# Altium PCB Soldeer.PcbDoc
Units mm, origin at the board's own origin, x right, y up, seen from the top; angles counter-clockwise.
Board outline 137.34 x 84.51 mm, 2 copper layers (Top Layer, Bottom Layer); 63 components, 73 nets, 216 pads, 72 vias.
Unrouted connection lines stored in the file: 42.
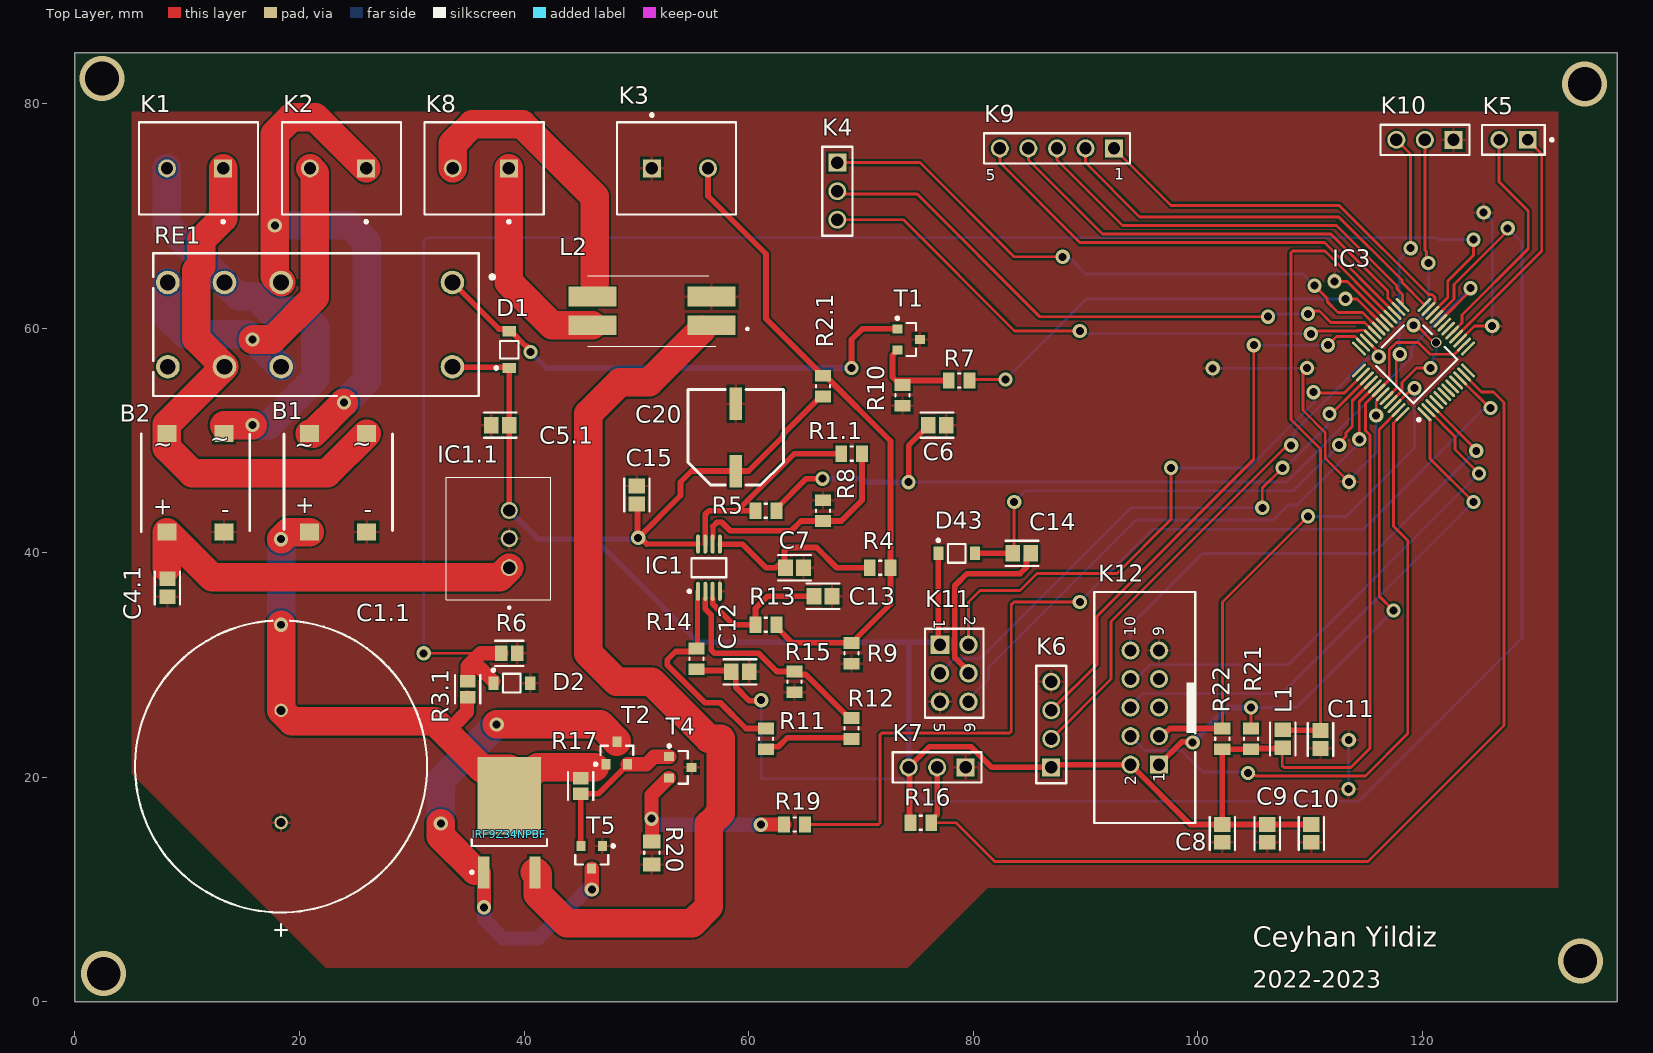
[diagram p0: Top Layer view]
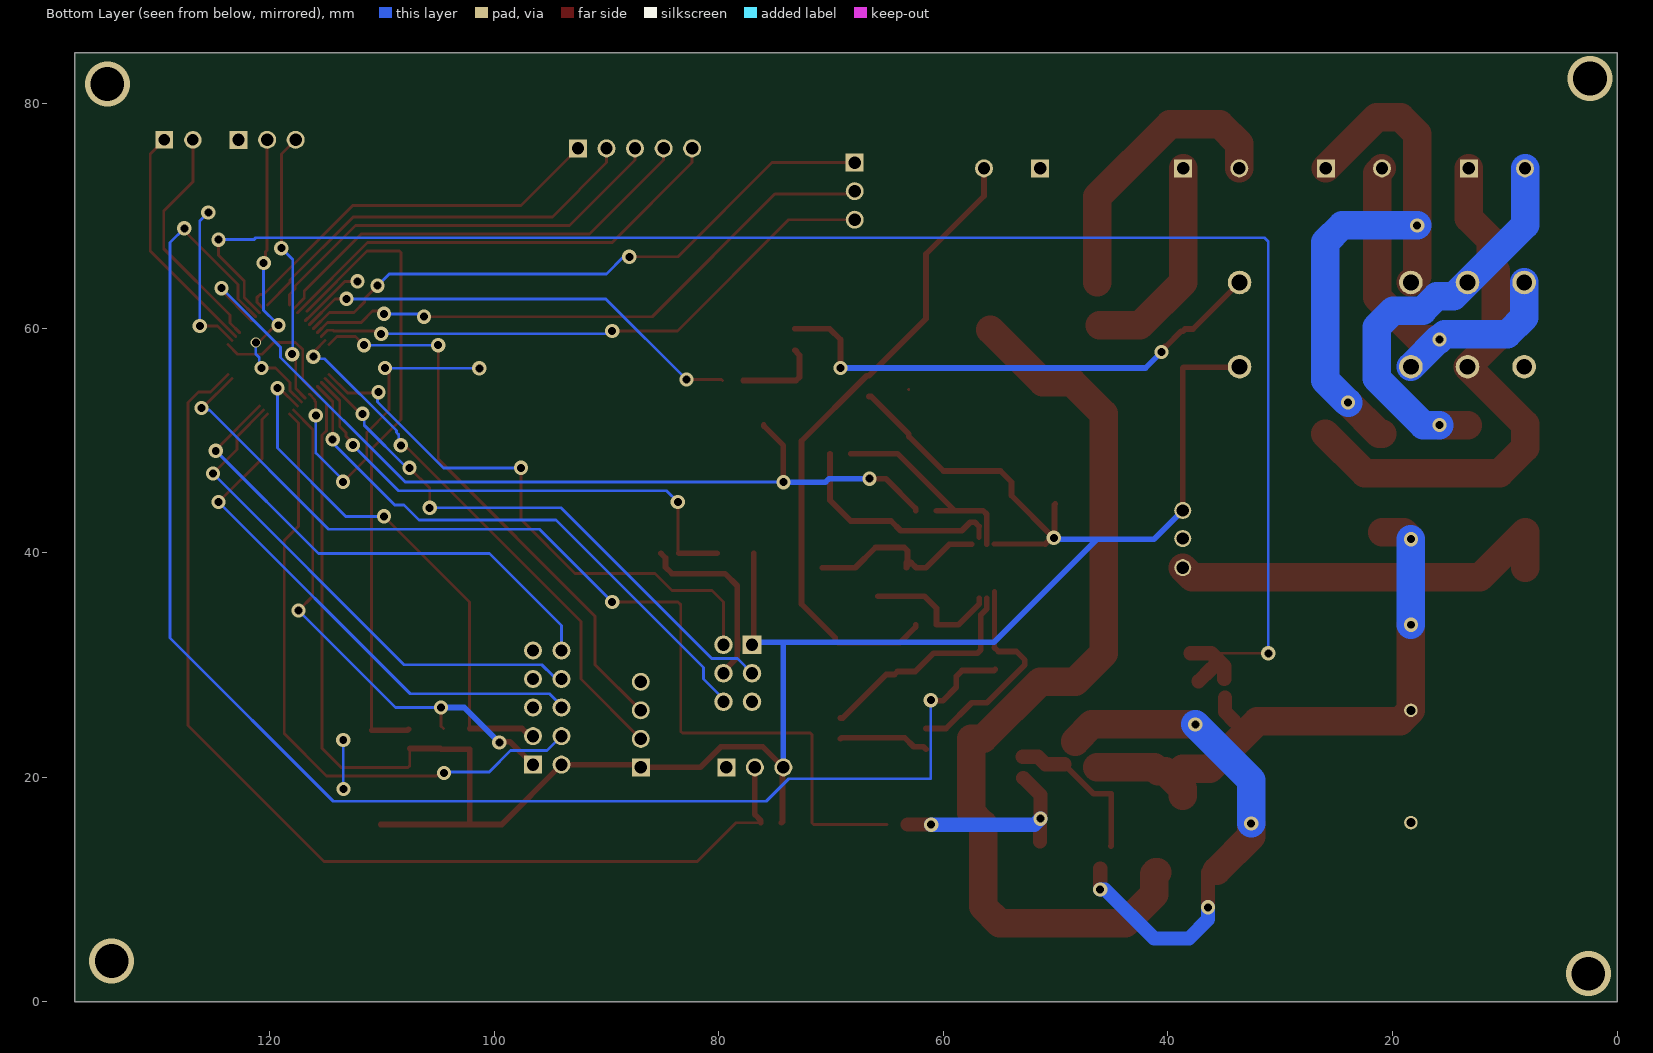
[diagram p1: Bottom Layer view, seen from below]
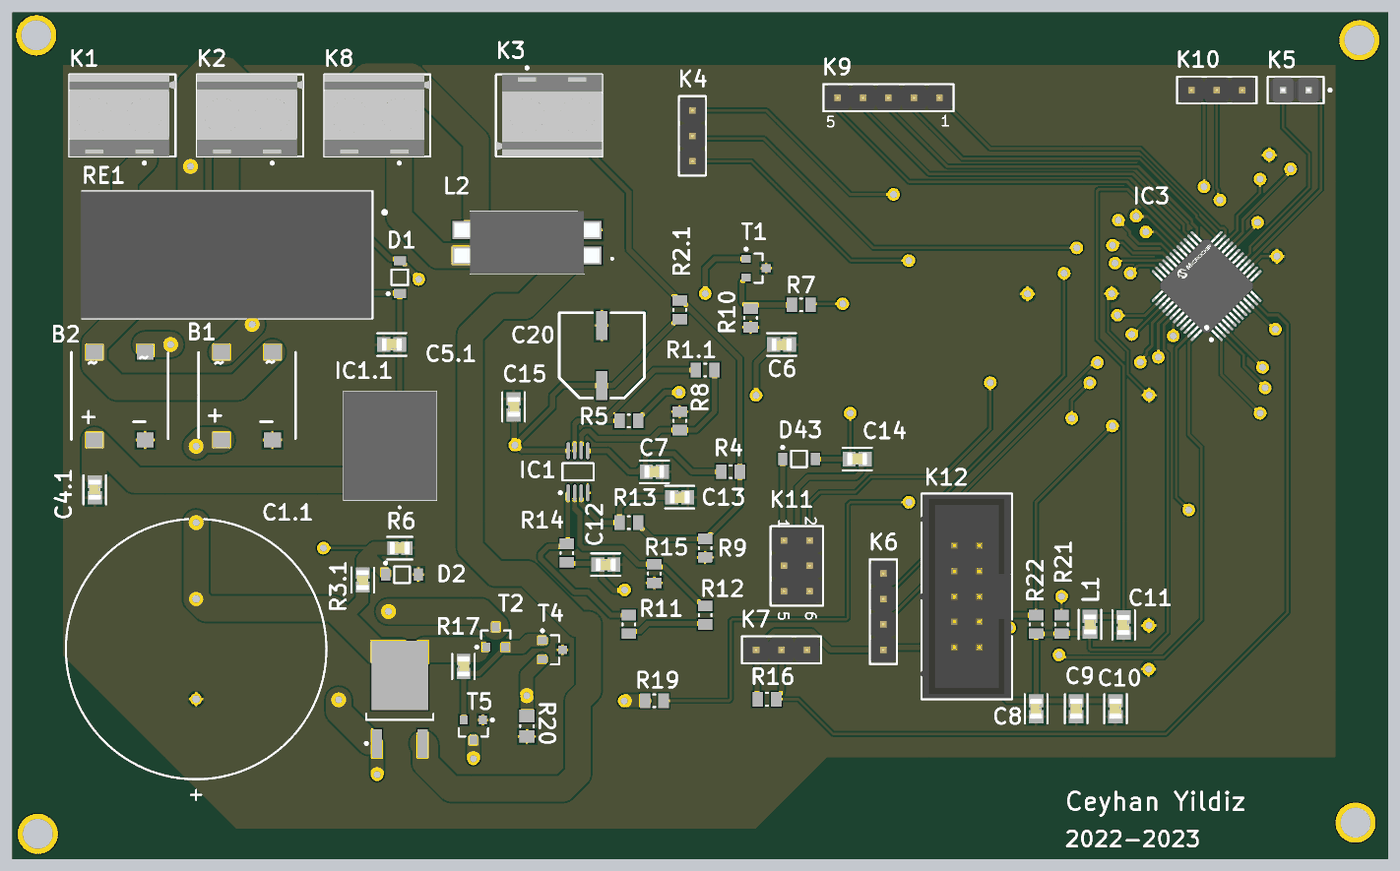
[diagram p2: 3D render of the assembled board from above, using the file's embedded part models]

## Layer stack, top to bottom
Top Solder: solder mask 0.0102, Solder Resist, Dk 3.5
Top Layer: signal copper 0.0356
Dielectric 1: dielectric 0.32, FR-4, Dk 4.8
Bottom Layer: signal copper 0.0356
Bottom Solder: solder mask 0.0102, Solder Resist, Dk 3.5

## Board outline
0,-0.001 137.337,-0.001 137.337,84.505 0,84.505

## Design rules (kind name [scope] priority, off if disabled: settings)
Clearance [All] p1: gap=0.118 ignorepadtopadclearanceinfootprint=FALSE
MinimumSolderMaskSliver [All] p1: minsoldermaskwidth=0.011
PolygonConnect [All] p1: connectstyle=Relief reliefconductorwidth=0.254 reliefentries=4 polygonreliefangle="90 Angle" airgapwidth=0.254
RoutingVias [All] p1: holewidth=0.711 width=1.27 viastyle="Through Hole" minholewidth=0.711 minwidth=1.27 maxholewidth=0.711 maxwidth=1.27
SilkToSolderMaskClearance [IsText] p1: minsilkscreentomaskgap=0.111 clearancetoexposedcopper=TRUE
SolderMaskExpansion [All] p1: expansion=0.102 istentingtop=FALSE
Width [All] p1: maxlimit=2.54 minlimit=0.229 preferedwidth=0.508
28 further rules are at their usual default settings.

## Classes and differential pairs
component class Voeding: B1 B2 C1.1 C4.1 C5.1 D1 D2 IC1.1 K1 K2 R3.1 R6 RE1
component class Thermokoppel: C6 C7 C12 C13 C15 C20 IC1 K3 R1.1 R2.1 R4 R5 R8 R9 R11 R12 R13 R14 R15
component class PBM_soldeerbout: IRF9Z34NPBF K8 L2 R17 R20 T2 T4 T5
component class CPU: C8 C9 C10 C11 C14 D43 IC3 K4 K5 K6 K7 K9 K10 K11 K12 L1 R7 R10 R16 R19 R21 R22 T1

## Components (designator, comment, footprint, x,y, rotation, side; value= is the part's Value field where it differs from the comment)
B1 "Bridge_Rectifier" ttf 23.444,46.278 r180 top
B2 "Bridge_Rectifier" ttf 10.744,46.278 r180 top
C1.1 "4700uf" CE_D25_L25_plugin 18.364,25.958 r270 top value="0.22 μF"
C4.1 "100uf" CC_0805_L 8.246,36.862 r270 top value="0.22 μF"
C5.1 "50uf" CC_0805_L 37.883,51.358 r180 top value="0.22 μF"
C6 "10nf" CC_0805_L 76.784,51.358 r0 top value="0.22 μF"
C7 "10nf" CC_0805_L 64.084,38.658 r0 top value="0.22 μF"
C8 "100n" CC_0805_L 102.184,14.997 r270 top value="0.22 μF"
C9 "10µ, 50V" CC_0805_L 106.181,14.997 r270 top value="0.22 μF"
C10 "100n" CC_0805_L 110.108,14.997 r270 top value="0.22 μF"
C11 "100n" CC_0805_L 110.919,23.361 r270 top value="0.22 μF"
C12 "10nf" CC_0805_L 59.247,29.382 r0 top value="0.22 μF"
C13 "10nf" CC_0805_L 66.624,36.118 r0 top value="0.22 μF"
C14 "100n" CC_0805_L 84.333,39.933 r0 top value="0.22 μF"
C15 "100n" CC_0805_L 50.046,45.13 r90 top value="0.22 μF"
C20 "10µ , 50V" CE_D8_L10 58.841,50.265 r270 top
D1 "Diode" SOD-123FL 38.684,58.073 r90 top value=15pF
D2 "Zener_Diode" SOD-123FL 38.908,28.38 r0 top
D43 "1n4148" SOD-123FL 78.529,39.933 r0 top value=15pF
IC1 "Dual_Opamp" MSOP_8_M 56.464,38.658 r90 top
IC1.1 "OKI-78SR-5/1.5-W36-C" OKI78SR515W36C 38.684,38.658 r90 top
IC3 "ATMEGA4809" TQFP_48_M 119.202,57.2 r135 top
IRF9Z34NPBF "MOSFET_P" TO_252 38.684,15.938 r90 top
K1 "282836-2" terminal_block 10.704,74.218 r180 top
K2 "282836-2" terminal_block 23.444,74.218 r180 top
K3 "282836-2" terminal_block 53.884,74.218 r0 top
K4 "61300311121" "pin header 1x3 - duplicate" 67.894,72.186 r270 top
K5 "M20-9990246" "pin header 1x2 - duplicate" 128.092,76.758 r180 top
K6 "61300411121" "pin header 1x4 - duplicate" 86.944,24.688 r90 top
K7 "61300311121" "pin header 1x3 - duplicate" 76.784,20.878 r180 top
K8 "282836-2" terminal_block 36.144,74.218 r180 top
K9 "61300511121" "pin header 1x5" 87.452,75.996 r180 top
K10 "UART0" "pin header 1x3 - duplicate" 120.218,76.758 r180 top
K11 "61300621121" "pin header 2x6" 78.308,29.26 r270 top
K12 "61201021621" "box header 10-pin" 95.272,26.204 r90 top
L1 "10µA" CC_0805_L 107.561,23.418 r270 top
L2 "Common_Mode_Choke" 2545 51.384,61.518 r90 top
R1.1 "18K" R_0805_M 69.164,48.818 r0 top
R2.1 "1M" R_0805_M 66.624,54.823 r270 top
R3.1 "66Kohm" CC_0805_m 34.984,27.838 r90 top
R4 "5K6" R_0805_M 71.704,38.658 r0 top
R5 "5K6" R_0805_M 61.544,43.738 r180 top
R6 "10Kohm" CC_0805_m 38.684,31.038 r0 top
R7 "10k" R_0805_M 78.739,55.325 r180 top
R8 "100E" R_0805_M 66.624,43.738 r270 top
R9 "10M" R_0805_M 69.164,31.038 r90 top
R10 "4,7k" R_0805_M 73.694,54.009 r90 top
R11 "18K" R_0805_M 61.544,23.418 r270 top
R12 "18K" R_0805_M 69.164,24.343 r90 top
R13 "5K6" R_0805_M 61.544,33.578 r0 top
R14 "5K6" R_0805_M 55.366,30.538 r90 top
R15 "100E" R_0805_M 64.084,28.498 r90 top
R16 "4,7k" R_0805_M 75.335,15.949 r180 top
R17 "4k7" CC_0805_m 45.039,19.223 r90 top
R19 "10K" R_0805_M 64.084,15.798 r0 top
R20 "4k7" R_0805_L 51.384,13.258 r90 top
R21 "4,7k" R_0805_M 104.724,23.418 r270 top
R22 "4,7k" R_0805_M 102.184,23.418 r270 top
RE1 "RELAY_GENERAL_PURPOSE" RT42 33.624,60.308 r180 top
T1 "Transistor_NPN" SOT_23 74.244,58.978 r0 top
T2 "BC547" SOT_23 48.268,22.158 r90 top
T4 "BC547" SOT_23 53.924,20.878 r0 top
T5 "BC557" SOT_23 46.027,12.879 r270 top

## Footprints (in the part's own frame and the unit in brackets; to place one, negate y for a bottom-side part, rotate by r counter-clockwise, add the part's x,y. Pads: shape width x height; smd on the part's side, far side on the other; paste and mask are expansions set on the pad)
2545 [mm]
  rect 1.78x4.27 smd: 1(-1.27,-5.305) 2(1.27,-5.305) 3(1.27,5.305) 4(-1.27,5.305)
  silkscreen extent -3.15,-8.6 3.15,5.69, body extent -3.15,-7.26 3.15,7.26, height 9.6
"box header 10-pin" [mm] "10 pins, straight, gold plating"
  rect 1.6x1.6 hole 1.1: 1(-5.08,-1.27)
  round 1.6 hole 1.1: 2(-5.08,1.27) 3(-2.54,-1.27) 4(-2.54,1.27) 5(0,-1.27) 6(0,1.27) 7(2.54,-1.27) 8(2.54,1.27) 9(5.08,-1.27) 10(5.08,1.27)
  silkscreen extent -10.28,-4.5 10.28,4.5, body extent -10.18,-4.42 10.18,4.75, height 9.13
CC_0805_L [mm]
  rect 1.305x1.456 smd paste+0 mask+0: 1(-0.801,0) 2(0.801,0)
  silkscreen extent -1.45,-1.13 1.45,1.13, body extent -1.7,-0.98 1.7,0.98, height 0.25
CC_0805_m [mm]
  rect 1.105x1.356 smd paste+0 mask+0: 1(-0.701,0) 2(0.701,0)
  silkscreen extent -1.25,-1.12 1.25,1.12, body extent -1.35,-0.82 1.35,0.82, height 0.25
CE_D8_L10 [mm]
  rect 2.9x1.1 smd: 1(-3,0) 2(3,0)
  Top Layer lines w0.254: -4.25,4.241 -4.259,4.25
  silkscreen extent -4.26,-4.25 4.25,4.25
CE_D25_L25_plugin [mm]
  round 1.2 hole 0.8: 1(0,0) 2(10,0)
  silkscreen extent -7.98,-13 20.07,13
MSOP_8_M [mm] "TSOP, 8-Leads, Body 3x3mm, Pitch 0.65mm, IPC Medium Density"
  oval 1.7x0.35 smd: 1(-2.1,0.975) 2(-2.1,0.325) 3(-2.1,-0.325) 4(-2.1,-0.975) 5(2.1,-0.975) 6(2.1,-0.325) 7(2.1,0.325) 8(2.1,0.975)
  silkscreen extent -2.22,-1.55 0.85,1.87, body extent -1.55,-1.55 1.55,1.55, height 1.1
OKI78SR515W36C [mm]
  round 1.519 hole 1.08: 1(0,0) 2(2.6,0) 3(5.1,0)
  silkscreen extent -3.6,-3.7 8.05,5.6, body extent -2.85,-3.7 8.05,5.6, height 16.6
"pin header 1x2 - duplicate" [mm]
  rect 1.57x1.57 hole 1.02 paste-1000 mask+0: 1(-1.27,0)
  round 1.57 hole 1.02 paste-1000 mask+0: 2(1.27,0)
  silkscreen extent -3.55,-1.32 2.79,1.32, body extent -2.89,-1.42 2.89,1.42, height 0.25
"pin header 1x3 - duplicate" [mm] "Pin Header, pitch 2.54 mm, THT, Vertical, single row, 3p"
  rect 1.6x1.6 hole 1.1: 1(-2.54,0)
  round 1.6 hole 1.1: 2(0,0) 3(2.54,0)
  silkscreen extent -3.96,-1.35 3.96,1.35, body extent -3.81,-1.27 3.81,1.27, height 8.57
"pin header 1x4 - duplicate" [mm] "Pin Header, pitch 2.54 mm, THT, Vertical, single row, 4p"
  rect 1.6x1.6 hole 1.1: 1(-3.81,0)
  round 1.6 hole 1.1: 2(-1.27,0) 3(1.27,0) 4(3.81,0)
  silkscreen extent -5.23,-1.35 5.23,1.35, body extent -5.08,-1.27 5.08,1.27, height 8.57
"pin header 1x5" [mm] "Pin Header, pitch 2.54 mm, THT, Vertical, single row, 5p"
  rect 1.6x1.6 hole 1.1: 1(-5.08,0)
  round 1.6 hole 1.1: 2(-2.54,0) 3(0,0) 4(2.54,0) 5(5.08,0)
  silkscreen extent -6.5,-1.35 6.5,1.35, body extent -6.35,-1.27 6.35,1.27, height 8.57
"pin header 2x6" [mm] "Pin Header, pitch 2.54 mm, THT, Vertical, dual row, 6p"
  rect 1.65x1.65 hole 1.1: 1(-2.54,-1.27)
  round 1.65 hole 1.1: 2(-2.54,1.27) 3(0,-1.27) 4(0,1.27) 5(2.54,-1.27) 6(2.54,1.27)
  silkscreen extent -3.96,-2.62 3.96,2.62, body extent -3.81,-2.54 3.81,2.54, height 8.59
R_0805_L [mm] "Chip Resistor, 2-Leads, Body 2.00x1.25mm, IPC Low Density"
  rect 1.25x1.55 smd: 1(-1.025,0) 2(1.025,0)
  silkscreen extent -0.1,-0.67 0.1,0.67, body extent -1.1,-0.72 1.1,0.72, height 0.5
R_0805_M [mm] "Chip Resistor, 2-Leads, Body 2.00x1.25mm, IPC Medium Density"
  rect 1.05x1.45 smd: 1(-0.925,0) 2(0.925,0)
  silkscreen extent -0.1,-0.63 0.1,0.63, body extent -1.1,-0.72 1.1,0.72, height 0.5
RT42 [mm]
  round 2.1 hole 1.4: 11(20.3,3.75) 12(15.26,3.75) 14(25.34,3.75) 21(20.3,-3.75) 22(15.26,-3.75) 24(25.34,-3.75) A1(0,3.75) A2(0,-3.75)
  silkscreen extent -3.67,-6.35 26.65,6.35, body extent -2.21,-6.35 26.79,6.35, height 15.86
SOD-123FL [mm] "SOD, 2-Leads, Body 2.7x1.65mm"
  rect 0.91x1.22 smd: 1(-1.635,0) 2(1.635,0)
  silkscreen extent -1.76,-0.82 0.78,1.28, body extent -1.35,-0.82 1.35,0.82, height 1
SOT_23 [mm] "SOT23, 3-Leads, Body 2.92x1.3mm, Pitch 0.95mm"
  rect 0.9x0.8 smd: 1(-1,0.95) 2(-1,-0.95) 3(1,0)
  silkscreen extent -1.12,-1.46 0.65,2.02, body extent -0.65,-1.46 0.65,1.46, height 1.11
terminal_block [mm] "Female Header, Pitch 5mm, 1 x 2 Position, Height 10mm"
  rect 1.6x1.6 hole 1.1: 1(-2.5,0)
  round 1.6 hole 1.1: 2(2.5,0)
  silkscreen extent -5.6,-4.1 5,4.87, body extent -5.6,-4.1 5,4.1, height 10
TO_252 [mm] "DPAK, 3-Leads, Body 6.5x6.12mm, Pitch 2.28mm, IPC Low Density"
  rect 2.85x1 smd: 1(-4.4,2.28) 3(-4.4,-2.28)
  rect 6.9x5.65 smd: 2(2.4,0)
  silkscreen extent -4.52,-3.35 -1.45,3.45, body extent -2.05,-3.32 4.17,3.32, height 2.35
TQFP_48_M [mm]
  rect 1.655x0.252 smd paste+0 mask+0: 1(-4.125,2.75)
  rrect100% 1.655x0.252 smd paste+0 mask+0: 2(-4.125,2.25) 3(-4.125,1.75) 4(-4.125,1.25) 5(-4.125,0.75) 6(-4.125,0.25) 7(-4.125,-0.25) 8(-4.125,-0.75) 9(-4.125,-1.25) 10(-4.125,-1.75) 11(-4.125,-2.25) 12(-4.125,-2.75) 25(4.125,-2.75) 26(4.125,-2.25) 27(4.125,-1.75) 28(4.125,-1.25) 29(4.125,-0.75) 30(4.125,-0.25) 31(4.125,0.25) 32(4.125,0.75) 33(4.125,1.25) 34(4.125,1.75) 35(4.125,2.25) 36(4.125,2.75)
  rrect100% 0.252x1.655 smd paste+0 mask+0: 13(-2.75,-4.125) 14(-2.25,-4.125) 15(-1.75,-4.125) 16(-1.25,-4.125) 17(-0.75,-4.125) 18(-0.25,-4.125) 19(0.25,-4.125) 20(0.75,-4.125) 21(1.25,-4.125) 22(1.75,-4.125) 23(2.25,-4.125) 24(2.75,-4.125) 37(2.75,4.125) 38(2.25,4.125) 39(1.75,4.125) 40(1.25,4.125) 41(0.75,4.125) 42(0.25,4.125) 43(-0.25,4.125) 44(-0.75,4.125) 45(-1.25,4.125) 46(-1.75,4.125) 47(-2.25,4.125) 48(-2.75,4.125)
  silkscreen extent -4.25,-2.75 2.75,3.58, body extent -5.2,-5.2 5.2,5.2, height 0.25
ttf [mm]
  rect 1.7x1.5 smd: 1(2.54,4.445) 2(-2.54,4.445) 3(-2.54,-4.318) 4(2.54,-4.318)
  silkscreen extent -4.83,-4.3 4.83,4.32

## Part data
B1 B2: Average Rectified Current-Max=0.8A, Forward Voltage=1V, Manufacturer="Diodes Inc", Package Description="4-Pin Small Outline Integrated Circuit, Body 4.7 x 3.8 mm, Pitch 2.5 mm", Package Reference=MiniDIP-4, Package Version=05/2016, Peak Current-Max=30A, Reverse Current-Max=5µA, Reverse Voltage-Max [Vrrm]=600V, Datasheet URL=http://www.diodes.com/_files/datasheets/ds17003.pdf, Datasheet Version="Rev. 13-2, 12/2010", Manufacturer URL=http://www.diodes.com/, Mounting Technology=SurfaceMount, Package URL=http://www.diodes.com/_files/packages/MiniDIP.pdf
C1.1 C4.1 C5.1 C6 C7 C8 C9 C10 C11 C12 C13 C14 C15: library part Capacitor_Ceramic, Capacitance="0.22 μF", Manufacturer=KEMET, Manufacturer Part Number=C0805C224K5RACTU, Package=C0805C-DN, Temperature="-55°C to +125°C", Temperature Characteristic=X7R, Temperature Coefficient=30ppm/°C, Temperature Range High=+125°C, Temperature Range Low=-55°C, Tolerance=0.1, Voltage Rating="50 V", Automotive=No, Category=Cap, ComponentLink2Description=Datasheet, ComponentLink2URL=https://content.kemet.com/datasheets/KEM_C1003_C0G_SMD.pdf, Device Class L1="Passive Components", Device Class L2=Capacitors, Device Class L3="Ceramic Capacitors", Digikey Description="CAP CER 0.22UF 50V X7R 0805", Height=0.88mm, Ipc Land Pattern Name=CAPC200125X78, Lead Free=Yes, Material=Ceramic, Mouser Description="CAP CER 0.22UF 50V X7R 0805", Octopart=https://octopart.com/c0805c224k5ractu-kemet-144670, RoHS=TRUE
C20: library part Capacitor_Electrolytic, Manufacturer=Panasonic, Max Operating Temperature="105 degC", Min Operating Temperature="-55 degC", Package Quantity=500, Voltage Rating="25 V", ComponentLink1Description="Manufacturer URL", ComponentLink1URL=http://www.panasonic.com/, ComponentLink2Description=Datasheet, ComponentLink2URL=http://industrial.panasonic.com/cdbs/www-data/pdf/RDE0000/ABA0000C1181.pdf, DatasheetVersion=03/2016, Height="10.2 mm", Lead Pitch="3.1 mm", Length="10.2 mm", Mount="Surface Mount", Mounting Technology="Surface Mount", PackageDescription="2-Pin Electrolytic Aluminum Capacitor, Body 8.3 x 8.3 mm", PackageReference=EEE-FK1E221P, Packaging="Tape and Reel", Pins=2, REACH SVHC="No SVHC", RoHSCompliant=true
D1: Capacitance=15pF, Forward Current=1A, Manufacturer=Diotec, Manufacturer Part Number=1N4007, Max Junction Temp=+175°C, Max Repetitive Reverse Voltage=1000V, Max Surge Forward Current=27A, Peak Reverse Current=5uA, Temperature="-50°C to +175°C", Temperature Range Low=-50°C, Automotive=No, Category=Diode, ComponentLink2Description=Datasheet, ComponentLink2URL=https://datasheet.octopart.com/1N4007-Diotec-datasheet-62346875.pdf, Device Class L1="Discrete Semiconductors", Device Class L2=Diodes, Device Class L3="Rectifier Diodes", Height=2.8mm, Ipc Land Pattern Name=DIOAD888W100L520D280, Lead Free=Yes, Octopart=https://octopart.com/1n4007-diotec-4040411, Package=1N4007, Reverse Voltage=1000V, RoHS=TRUE, Temperature Range High=+175°C
D2: Manufacturer="On Semiconductor", PartNumber=1SMB5920BT3G, ComponentLink1Description="Manufacturer URL", ComponentLink1URL=http://www.onsemi.com/, ComponentLink2Description=Datasheet, ComponentLink2URL=http://www.onsemi.com/pub_link/Collateral/1SMB5913BT3-D.PDF, ComponentLink3Description="Package Specification", ComponentLink3URL=http://www.onsemi.com/pub_link/Collateral/1SMB5913BT3-D.PDF, DatasheetVersion="Rev. 8", Mounting Technology="Surface Mount", PackageDescription="2-Pin Small Molded Package, J-Bend Lead, Body 4.33 x 3.625 mm", PackageReference=SMB-2-403A-03_H, PackageVersion="Rev. H, 05/2011", Packing="Tape and Reel", RoHS=Pb-Free, VZ Typ (V)=6.2
D43: library part Diode, Capacitance=15pF, Forward Current=1A, Manufacturer=Diotec, Manufacturer Part Number=1N4007, Max Junction Temp=+175°C, Max Repetitive Reverse Voltage=1000V, Max Surge Forward Current=27A, Peak Reverse Current=5uA, Temperature="-50°C to +175°C", Temperature Range Low=-50°C, Automotive=No, Category=Diode, ComponentLink2Description=Datasheet, ComponentLink2URL=https://datasheet.octopart.com/1N4007-Diotec-datasheet-62346875.pdf, Device Class L1="Discrete Semiconductors", Device Class L2=Diodes, Device Class L3="Rectifier Diodes", Height=2.8mm, Ipc Land Pattern Name=DIOAD888W100L520D280, Lead Free=Yes, Octopart=https://octopart.com/1n4007-diotec-4040411, Package=1N4007, Reverse Voltage=1000V, RoHS=TRUE, Temperature Range High=+175°C
IC1: Case/Package=PDIP, Input Bias Current=1pA, Input Offset Voltage (Vos)=4.5mV, Max Operating Temperature=125°C, Max Supply Voltage=6V, Min Operating Temperature=-40°C, Min Supply Voltage=1.8V, Nominal Supply Current=100uA, Operating Supply Voltage=5.5V, Output Current=23mA, Package Quantity=60, Power Supply Rejection Ratio (PSRR)=86dB, Voltage Gain=112dB, Amplifier Type="GENERAL PURPOSE", Bandwidth=1MHz, Common Mode Rejection Ratio=60dB, Gain Bandwidth Product=1MHz, Height=3.3mm, Input Offset Voltage-Max=4.5mV, Lead Free="Lead Free", Length=9.27mm, Mount="Through Hole", Number of Amplifiers=2, Number of Channels=2, Number Of Circuits=2, Number of Elements=2, Number of Pins=8, Operating Supply Current=100uA, Output Current per Channel=23mA, Packaging=Rail/Tube, Radiation Hardening=No, REACH SVHC="No SVHC", RoHS Compliant=Yes, Slew Rate=0.6V/µs, Slew Rate-Nom=0.6V/µs, Supply Current=100uA, Technology=CMOS, Unity Gain Bandwidth Product=1MHz, Width=6.35mm
IC1.1: "Non-Isolated DC/DC Converter, 7.5 W, 7 to 36 V, 1.5 A, -40 to 85 degC, 3-Pin THD, RoHS", Current - Output (Max)=1.5A, Manufacturer=Murata, Operating Temperature=-40degC~85degC, Package / Case=3-SIPModule, Power (Watts) - Manufacture Series=8W, Voltage - Input (Max)=36V, Voltage - Input (Min)=7V, Voltage - Isolation=-, Voltage - Output 1=5V, Applications=ITE(Commercial), Category=PowerSupplies-BoardMount, Datasheet URL=https://datasheet.ciiva.com/8006/1790439-8006672.pdf, Datasheet Version=Oct-13, Efficiency=90.5%, Family=DCDCConverters, Features=SCP, Manufacturer URL=http://www.murata.com/, Mounting Type=ThroughHole, Number of Outputs=1, Packaging=Tube, Power (Watts) - Max=8W, Series=Okami™OKI-78SR, Size / Dimension="0.41\"Lx0.30\"Wx0.65\"H(10.4mmx7.6mmx16.5mm)", Type=LinearRegulatorReplacement, Voltage - Output 2=-, Voltage - Output 3=-
IC3: Case/Package=TQFP, Max Operating Temperature=85°C, Min Operating Temperature=-40°C, Core Architecture=AVR, Interface=I2C, Memory Size=48KB, Memory Type=FLASH, Mount="Surface Mount", Number of I/Os=41, Oscillator Type=Internal, Peripherals="Brown-out Detect/Reset", RoHS Compliant=Yes, Series="megaAVR® 0, Functional Safety (FuSa)"
IRF9Z34NPBF: Continuous Drain Current Id=2.4A, Current Temperature=25°C, Drain Source Voltage Vds=20V, Manufacturer="Fairchild Semiconductor", On Resistance Rds(on)=52mohm, Operating Temperature Max=150°C, Operating Temperature Min=-55°C, Operating Temperature Range=-55°Cto+150°C, Package / Case=SOT-23, Package Description="3-Pin Small Outline Transistor, Body 2.92 x 1.4 mm, Pitch 0.95 mm", Package Reference=SSOT3L, Package Version="Rev. 3, 05/2015", Power Dissipation Pd=500mW, Pulse Current Idm=10A, Rds(on) Test Voltage Vgs=-4.5V, Threshold Voltage Vgs Typ=-800mV, Voltage Vds Typ=-20V, Voltage Vgs th Max=-1.5V, Current Id Max=2.4A, Datasheet URL=https://www.fairchildsemi.com/datasheets/FD/FDN304P.pdf, Datasheet Version="Rev. C, 01/2001", External Depth=2.5mm, External Length / Height=1.12mm, External Width=3.05mm, Full Power Rating Temperature=25°C, Manufacturer URL=https://www.fairchildsemi.com/, Mounting Technology=SurfaceMount, No. of Pins=3, Package URL=https://www.fairchildsemi.com/package-drawings/MA/MA03B.pdf, Reel Quantity=3000, SMD Marking=304P, SVHC=NoSVHC(19-Dec-2012), Tape Width=8mm, Termination Type=SMD, Transistor Case Style=SOT-23, Transistor Polarity=PChannel, Voltage Vds=20V, Voltage Vgs Max=-800mV, Voltage Vgs Rds on Measurement=-4.5V
K1 K2 K3 K8: library part "1x2 terminal block", "Female Header, Pitch 5 mm, 1 x 2 Position, Height 10 mm, Tail Length 3.5 mm, Rohs, Bulk", Color=Green, Current=13.5A, Manufacturer="TE Connectivity", Package Description="Female Header, Pitch 5 mm, 1 x 2 Position, Height 10 mm, Tail Length 3.5 mm", Package Reference=THD, Standard Package=300, Voltage=300V, 3D Model=282836-2.pdf, Category=Connectors,Interconnects, Clamp Material - Plating=Brass-NickelPlated, Contact Material - Plating=Brass-TinPlated, Datasheet URL=http://www.te.com.cn/commerce/DocumentDelivery/DDEController?Action=showdoc&DocId=Catalog+Section%7F1308389_EUROSTYLE_TERMINAL_BLOCKS%7F0607%7Fpdf%7FEnglish%7FENG_CS_1308389_EUROSTYLE_TERMINAL_BLOCKS_0607.pdf%7F282836-2, Dynamic Catalog=BuchananSeries, Family=TerminalBlocks-WiretoBoard, Featured Product=EurostyleTerminalBlockConnectors, Features=Interlocking(Side), Housing Material=Polyamide(PA66),Nylon6/6, Manufacturer URL=http://www.te.com, Mating Orientation=HorizontalwithBoard, Mounting Type=ThroughHole, Number of Levels=1, Other Names="5ULV-02B / A98076", Packaging=Bulk, Pitch="0.197\"(5.00mm)", Positions Per Level=2, Product Training Modules=Wire-to-BoardEurostyleTerminalBlocks, RoHS Information=282836-2StatementofCompliance, Screw Material - Plating=Brass-NickelPlated, Screw Thread=M3, Series=Buchanan, Torque - Screw=0.68Nm(6Lb-In), Wire Gauge=16-30AWG, Wire Termination=Screw-RisingCageClamp
K4 K7: library part 1x3, "THT Vertical Pin Header WR-PHD, Pitch 2.54 mm, Single Row, 3 pins", Contact Resistance=20mOhm, Manufacturer="Wurth Elektronik", Operating Temperature=-40to105degC, Rated Current=3A, Withstanding Voltage=500VAC, Working Voltage=250VAC, Datasheet URL=https://katalog.we-online.de/em/datasheet/6130xx11121.pdf, Gender=Male, Manufacturer URL=http://www.we-online.de, Mounting Technology=THT, Orientation=Vertical, Package Reference=61300311121, Packaging=Bag, Part Number=61300311121, Pin Number=3, Pitch=2.54mm, Publisher=WurthElektronik, Row Number=Single
K5: library part 1x2, "CONN HEADER VERT 2POS 2.54MM", Current Rating=3A, Manufacturer=Harwin, Temperature="-40°C to +105°C", Temperature Range High=+105°C, Temperature Range Low=-40°C, Automotive=No, Category=Conn, ComponentLink2Description=Datasheet, ComponentLink2URL=https://cdn.harwin.com/pdfs/M20-999.pdf, Conn Gender=Male, Conn Orientation=Vertical, Contact Material=Tin,Nickel, Device Class L1=Connectors, Device Class L2="Headers and Wire Housings", Device Class L3=unset, Digikey Description="CONN HEADER VERT 2POS 2.54MM", Height=8.99mm, Lead Free=Yes, Manufacturer Part Number=M20-9990246, Mouser Description="2.54mm (0.1\") Pitch SIL Vertical PC Tail Pin Header, 6.1mm mating pin height, tin, 2 contacts", Number Of Contacts=2, Number Of Rows=1, Octopart=https://octopart.com/m20-9990246-harwin-2590635, Package=M20-9990246, Pitch=2.54mm, RoHS=TRUE
K6: library part 1x4, "THT Vertical Pin Header WR-PHD, Pitch 2.54 mm, Single Row, 4 pins", Contact Resistance=20mOhm, Manufacturer="Wurth Elektronik", Operating Temperature=-40to105degC, Rated Current=3A, Withstanding Voltage=500VAC, Working Voltage=250VAC, Datasheet URL=https://katalog.we-online.de/em/datasheet/6130xx11121.pdf, Gender=Male, Manufacturer URL=http://www.we-online.de, Mounting Technology=THT, Orientation=Vertical, Package Reference=61300411121, Packaging=Bag, Part Number=61300411121, Pin Number=4, Pitch=2.54mm, Publisher=WurthElektronik, Row Number=Single
K9: library part 1x5, "THT Vertical Pin Header WR-PHD, Pitch 2.54 mm, Single Row, 5 pins", Contact Resistance=20mOhm, Manufacturer="Wurth Elektronik", Operating Temperature=-40to105degC, Rated Current=3A, Withstanding Voltage=500VAC, Working Voltage=250VAC, Datasheet URL=https://katalog.we-online.de/em/datasheet/6130xx11121.pdf, Gender=Male, Manufacturer URL=http://www.we-online.de, Mounting Technology=THT, Orientation=Vertical, Package Reference=61300511121, Packaging=Bag, Part Number=61300511121, Pin Number=5, Pitch=2.54mm, Publisher=WurthElektronik, Row Number=Single
K10: library part 1x3, "THT Vertical Pin Header WR-PHD, Pitch 2.54 mm, Single Row, 3 pins", Contact Resistance=20mOhm, Manufacturer="Wurth Elektronik", Operating Temperature=-40to105degC, Package Reference=61300311121, Rated Current=3A, Withstanding Voltage=500VAC, Working Voltage=250VAC, Datasheet URL=https://katalog.we-online.de/em/datasheet/6130xx11121.pdf, Gender=Male, Manufacturer URL=http://www.we-online.de, Mounting Technology=THT, Orientation=Vertical, Packaging=Bag, Part Number=61300311121, Pin Number=3, Pitch=2.54mm, Publisher=WurthElektronik, Row Number=Single
K11: library part 2x3, "THT Vertical Pin Header WR-PHD, Pitch 2.54 mm, Dual Row, 6 pins", Contact Resistance=20mOhm, Manufacturer="Wurth Elektronik", Operating Temperature=-40to105degC, Rated Current=3A, Withstanding Voltage=500VAC, Working Voltage=250VAC, Datasheet URL=https://katalog.we-online.de/em/datasheet/6130xx21121.pdf, Gender=Male, Manufacturer URL=http://www.we-online.de, Mounting Technology=THT, Orientation=Vertical, Package Reference=61300621121, Packaging=Bag, Part Number=61300621121, Pin Number=6, Pitch=2.54mm, Publisher=WurthElektronik, Row Number=Dual
K12: library part 5x2, "Male Box Header WR-BHD, THT, Vertical, pitch 2.54 mm, 10 pins", Contact Resistance=20mOhm, Manufacturer="Wurth Elektronik", Operating Temperature=-40to125degC, Withstanding Voltage=500VAC, Working Voltage=250VAC, Datasheet URL=https://katalog.we-online.de/em/datasheet/6120xx21621.pdf, Gender=Male, Manufacturer URL=http://www.we-online.de, Mounting Technology=THT, Orientation=Vertical, Package Reference=61201021621, Packaging=Tray, Part Number=61201021621, Pin Number=10, Pitch=2.54mm, Published Date=August2018, Publisher=WurthElektronik
L1: library part Choke, Case/Package=1350, Current Rating=8.5A, DC Resistance (DCR)=14.1mR, Inductance=10uH, Inductance Tolerance=20%, Max Operating Temperature=155°C, Min Operating Temperature=-40°C, Package Quantity=1, Ratings=AEC-Q200, Resistor Type=Wirewound, Saturation Current=10A, Self Resonant Frequency=18MHz, Series Resistance=14.1R, Test Frequency=100kHz, Height=4.7mm, Height - Seated (Max)=0.197inch, Length=0.512inch, Max DC Current=8.5A, Mount="Surface Mount", Packaging="Tape and Reel", RMS Current (Irms)=8.5A, RoHS Compliant=Yes, Series=WE-HCI, Shielding=Shielded, Termination=SMD/SMT, Tolerance=20%, Width=12.8mm
L2: Case/Package=1808, Current=2A, Current Rating=2.3A, DC Resistance (DCR)=60mR, Insulation Resistance=10MR, Max Operating Temperature=85°C, Max Voltage Rating (DC)=50V, Min Operating Temperature=-40°C, Package Quantity=1, Test Frequency=100MHz, DC Current=2A, DC Resistance-Max=60mR, Depth=4.7mm, Element Configuration=Dual, Height=2mm, Impedance=900R, Lead Free="Lead Free", Length=0.185inch, Max Current Rating=2A, Max DC Current=2A, Mount="Surface Mount", Number of Lines=2, Number of Pins=4, Packaging="Tape and Reel", Radiation Hardening=No, REACH SVHC="No SVHC", RoHS Compliant=Yes, Series=ACM, Termination=Flat, Voltage Rating=50V, Voltage Rating (DC)=50V, Width=4.5mm
R1.1 R2.1 R3.1 R4 R5 R6 R7 R8 R9 R10 R11 R12 R13 R14 R15 R16 R17 R19 R20 R21 R22: library part Resistor, Manufacturer="Vishay Dale", Part Number=CRCW08050000Z0EA
RE1: Ambient Temperature Range High=+85°C, Ambient Temperature Range Low=-40°C, Coil Power=403mW, Coil Resistance=62Ω, Coil Voltage=5V, Current Rating=8A, Manufacturer="TE Connectivity", Manufacturer Part Number=RT424005, Automotive=No, Category=Relay, Coil Type=Non-Latching, ComponentLink2Description=Datasheet, ComponentLink2URL=https://www.te.com/commerce/DocumentDelivery/DDEController?Action=showdoc&DocId=Data+Sheet%7FRT2%7F1014%7Fpdf%7FEnglish%7FENG_DS_RT2_1014.pdf%7F5-1393243-9, Device Class L1=Electromechanical, Device Class L2=Relays, Device Class L3="Power Relays", Digikey Description="RELAY GENERAL PURPOSE DPDT 8A 5V", Height=15.7mm, Lead Free=Yes, Mouser Description="General Purpose Relay, Rt2 Series, Power, Non Latching, Dpdt, 5 Vdc, 8 A Rohs Compliant: Yes", Number Of Contacts=2, Octopart=https://octopart.com/5-1393243-9-te+connectivity-41835766, Package=RT424005, RoHS=TRUE, Throw Configuration=DPDT
T1: Manufacturer="On Semiconductor", PartNumber=BC547C, ComponentLink1Description="Manufacturer URL", ComponentLink1URL=http://www.onsemi.com/, ComponentLink2Description=Datasheet, ComponentLink2URL=http://www.onsemi.com/pub_link/Collateral/BC546-D.PDF, ComponentLink3Description="Package Specification", ComponentLink3URL=http://www.onsemi.cn/pub_link/Collateral/2N6426-D.PDF, DatasheetVersion="Rev. 7", fT Min (MHz)=150, IC Continuous (A)=0.1, Mounting Technology="Through Hole", PackageDescription="3-Pin Transistor Outline, Body 4.825 x 3.685 mm, Pitch 1.27 mm", PackageReference=TO-92-3-29-11_AM_SL, PackageVersion="Rev. AM", Packing="Bulk Box", Polarity=NPN, RoHS=FALSE
T2 T4: library part Transistor_NPN, Manufacturer="On Semiconductor", PartNumber=BC547C, ComponentLink1Description="Manufacturer URL", ComponentLink1URL=http://www.onsemi.com/, ComponentLink2Description=Datasheet, ComponentLink2URL=http://www.onsemi.com/pub_link/Collateral/BC546-D.PDF, ComponentLink3Description="Package Specification", ComponentLink3URL=http://www.onsemi.cn/pub_link/Collateral/2N6426-D.PDF, DatasheetVersion="Rev. 7", fT Min (MHz)=150, IC Continuous (A)=0.1, Mounting Technology="Through Hole", PackageDescription="3-Pin Transistor Outline, Body 4.825 x 3.685 mm, Pitch 1.27 mm", PackageReference=TO-92-3-29-11_AM_SL, PackageVersion="Rev. AM", Packing="Bulk Box", Polarity=NPN, RoHS=FALSE
T5: library part Transistor_PNP, Manufacturer="On Semiconductor", PartNumber=BC557C, ComponentLink1Description="Manufacturer URL", ComponentLink1URL=http://www.onsemi.com/, ComponentLink2Description=Datasheet, ComponentLink2URL=http://www.onsemi.com/pub_link/Collateral/BC556B-D.PDF, ComponentLink3Description="Package Specification", ComponentLink3URL=http://www.onsemi.cn/pub_link/Collateral/2N6426-D.PDF, DatasheetVersion="Rev. 3", IC Continuous (A)=-0.1, Mounting Technology="Through Hole", PackageDescription="3-Pin Transistor Outline, Body 4.825 x 3.685 mm, Pitch 1.27 mm", PackageReference=TO-92-3-29-11_AM_SL, PackageVersion="Rev. AM", Packing="Bulk Box", Polarity=PNP, RoHS=FALSE

## Via types
v1: diameter 1.27, hole 0.711, Top Layer to Bottom Layer, 67 vias
v2: diameter 4, hole 3, Top Layer to Bottom Layer, 4 vias
v3: diameter 0.914, hole 0.711, Top Layer to Bottom Layer, 1 vias

## Nets (pads, with @x,y where several pads share a name; then routed paths per layer and width w, separated by ;. In a path a pad name is that pad's centre, name@x,y a point inside that pad or via, vN(x,y) a via of type N, cw(c..) or ccw(c..) an arc to the next point about the centre after c; other vN are vias at no path point)
+5: C5.1.1 C8.1 C9.1 C10.1 C15.1 C20.2 D1.1 D43.1 IC1.1.3 IC1.8 IC3.14 IC3.42 K6.1 K7.3 K11.1 K12.2 L1.2 R2.1.2 R16.2 R21.2 R22.2 RE1.A1 | length 226.1
  Top Layer w0.254: L1.2@107.499,22.555 107.518,22.535 107.518,21.026 107.667,20.878 113.614,20.878 115.316,22.579 115.316,50.477 114.935,50.858 114.935,53.286 IC3.42 117.043,55.394 117.043,58.076 117.691,58.724 119.62,58.724 120.672,57.671 122.855,57.671 IC3.14
  Top Layer w0.457: 50.927,40.758 IC1.8
  Top Layer w0.508: RE1.A1 33.684,56.498 38.624,56.498 D1.1 C5.1.1 IC1.1.3 ; C15.1 50.104,44.271 50.104,41.374 v1(50.162,41.316) ; 50.927,40.758 50.368,41.316 v1(50.162,41.316) ; R2.1.2 66.424,53.898 63.072,50.546 63.072,50.346 59.991,47.265 C20.2 54.911,47.265 53.924,46.278 53.924,45.078 v1(50.162,41.316) ; R16.2 74.327,16.032 74.327,20.795 K7.3 76.072,22.705 79.822,22.705 81.65,20.878 K6.1 87.191,21.124 K12.2 99.329,15.798 C8.1 ; D43.1 76.894,32.114 K11.1@76.988,32.02 ; L1.2@107.499,22.555 104.786,22.555 R21.2 R22.2 C8.1 ; C10.1 C9.1 C8.1
  Bottom Layer w0.508: IC1.1.3 41.244,41.198 46.304,41.198 ; v1(50.162,41.316) 50.043,41.198 46.304,41.198 ; K7.3 74.244,31.96 74.253,31.97 ; K11.1@76.988,32.02 55.481,32.02 46.304,41.198
D: IC3.11 K7.2 R16.1 | length 95.9
  Top Layer w0.254: R16.1 78.46,15.949 81.913,12.496 115.138,12.496 127.262,24.619 127.262,53.38 126.327,54.314 125.269,54.314 IC3.11
  Top Layer w0.508: R16.1 76.26,16.149 76.784,16.673 K7.2
GND: B1.2 B2.2 C1.1.2 C4.1.2 C5.1.2 C6.2 C7.2 C8.2 C9.2 C10.2 C11.2 C12.2 C13.2 C15.2 C20.1 D2.2 IC1.1.2 IC1.4 IC3.15 IC3.29 IC3.43 K3.1 K6.4 K7.1 K10.1 K11.5 K12.9 L2.2 R6.2 R8.1 R9.1 R10.1 R15.1 R20.1 T1.3 T4.3 T5.1 | length 53.7
  Top Layer w0.229: v1(109.728,56.438) 109.677,56.387 109.677,56.361 109.364,56.048 109.364,52.677 111.338,50.703 111.338,48.427 v1(113.461,46.303) ; v1(115.874,52.221) 115.874,53.403 115.961,53.49 115.961,53.605 IC3.43
  Top Layer w0.254: v1(112.166,64.159) 112.268,64.159 112.293,64.134 113.302,64.134 116.294,61.142 116.32,61.142 IC3.29 ; IC3.15 124.649,60.171 v1(126.212,60.171)
  Bottom Layer w0.229: v1(101.32,56.412) 101.346,56.438 v1(109.728,56.438) ; v1(113.461,46.303) 113.461,46.455 115.874,48.868 v1(115.874,52.221)
  Bottom Layer w0.254: v1(113.411,18.947) 113.436,18.973 v1(113.436,23.316) ; v1(125.45,70.281) 126.212,69.519 v1(126.212,60.171)
NetB2_1: B2.1 C4.1.1 IC1.1.1 | length 35.7
  Top Layer w2.54: 8.204,38.658 B2.1 12.216,37.82 37.847,37.82 IC1.1.1
NetC3_2: 
NetC4_2: 
NetC5_2: 
NetC6_1: C6.1 IC3.20 R5.1 | length 80.7
  Top Layer w0.254: IC3.20 124.282,63.34 v1(124.282,63.55)
  Top Layer w0.508: R5.1 62.469,43.938 65.114,46.582 v1(66.573,46.582) ; v1(74.244,46.278) 74.244,49.543 75.983,51.282 C6.1
  Bottom Layer w0.254: v1(74.244,46.278) 107.918,46.278 119.018,57.378 119.018,58.286 v1(124.282,63.55)
  Bottom Layer w0.508: v1(66.573,46.582) 70.183,46.582 70.488,46.278 v1(74.244,46.278)
NetC7_1: C7.1 IC1.5 R4.1 | length 17.5
  Top Layer w0.483: IC1.5@57.468,40.743 59.458,40.743
  Top Layer w0.508: 59.458,40.743 61.544,38.658 62.413,38.658 62.886,39.13 63.283,39.13 C7.1 63.283,38.733 C7.1@62.885,39.132 ; C7.1@63.185,39.13 63.185,40.162 63.483,40.459 66.044,40.459 67.846,38.658 R4.1
NetC11_1: C11.1 IC3.28 L1.1 | length 57.6
  Top Layer w0.254: C11.1 110.919,49.227 108.28,51.866 108.28,66.703 108.429,66.852 111.316,66.852 IC3.28@116.671,61.497 ; IC3.28@116.672,61.497 IC3.28@116.673,61.496
  Top Layer w0.508: L1.1@107.635,24.268 107.713,24.19 C11.1@110.891,24.19
NetC12_1: C12.1 IC3.21 R14.1 | length 136.6
  Top Layer w0.254: IC3.21 122.822,62.587 122.822,63.868 127.584,68.63 v1(127.584,68.884)
  Top Layer w0.508: R14.1 55.481,29.497 58.331,29.497 C12.1 58.844,28.984 58.844,28.018 60.045,26.817 61.075,26.817 v1(61.121,26.863)
  Bottom Layer w0.254: v1(61.121,26.863) 61.121,19.868 73.763,19.868 75.776,17.855 114.325,17.855 128.854,32.384 128.854,67.614 v1(127.584,68.884)
NetC13_1: C13.1 IC1.3 R13.1 | length 12.2
  Top Layer w0.483: IC1.3@56.795,35.949 56.795,35.444 56.799,35.44
  Top Layer w0.508: 56.799,35.44 56.799,35.425 58.647,33.578 R13.1 60.619,35.053 61.684,36.118 C13.1
NetC14_1: C14.1 D43.2 IC3.40 | length 45.8
  Top Layer w0.254: C14.1 83.642,40.042 v1(83.642,44.5) ; v1(112.585,49.583) 112.585,49.776 113.207,50.398 113.207,50.697 113.752,51.242 113.752,53.517 IC3.40
  Top Layer w0.508: D43.2 C14.1
  Bottom Layer w0.254: v1(83.642,44.5) 84.658,45.516 108.517,45.516 v1(112.585,49.583)
NetC14_2: C14.2 K11.4 | length 16.5
  Top Layer w0.508: K11.4@79.528,29.48 78.359,30.65 78.359,31.241 78.321,31.279 78.321,32.32 78.359,32.358 78.359,37.053 79.438,38.132 84.173,38.132 84.736,38.695 84.736,39.534 C14.2
NetD1_2: D1.2 RE1.A2 T1.1 | length 45.8
  Top Layer w0.508: RE1.A2 37.773,59.909 38.483,59.909 D1.2 38.839,59.708 40.187,58.359 40.28,58.359 40.577,58.062 v1(40.577,57.866) ; v1(69.164,56.438) 69.164,58.978 70.114,59.928 T1.1
  Bottom Layer w0.508: v1(40.577,57.866) 42.005,56.438 v1(69.164,56.438)
NetD2_1: D2.1 IC3.22 R3.1.2 R6.1 | length 151.2
  Top Layer w0.254: v1(31.064,31.038) 36.144,31.038 ; IC3.22 122.25,62.722 122.25,64.193 124.536,66.479 v1(124.536,67.868)
  Top Layer w0.508: 36.144,29.664 36.144,31.038 ; D2.1 D2.1@37.273,28.535
  Top Layer w1.27: R3.1.2@34.988,28.752 34.988,29.881 36.144,31.038 R6.1 ; 36.144,29.664 D2.1@37.273,28.535
  Bottom Layer w0.254: v1(31.064,31.038) 31.064,67.719 31.39,68.045 121.224,68.045 121.401,67.868 v1(124.536,67.868)
NetDisplay_1: 
NetDisplay_2: 
NetDisplay_3: 
NetDisplay_4: 
NetDisplay_5: 
NetDisplay_6: 
NetDisplay_7: 
NetDisplay_8: 
NetDisplay_9: 
NetDisplay_10: 
NetDisplay_11: 
NetDisplay_12: 
NetIC1_1: IC1.1 R11.1 R14.2 | length 19.7
  Top Layer w0.457: R14.2@55.46,31.557 IC1.1@55.46,36.529
  Top Layer w0.508: R14.2@55.46,31.557 55.095,31.192 53.499,31.192 52.74,30.433 52.74,30.012 56.117,26.636 57.471,26.636 59.765,24.343 R11.1
NetIC1_2: IC1.2 R12.2 R15.2 | length 19.8
  Top Layer w0.457: IC1.2@56.137,35.936 56.137,35.172 56.139,35.17 56.139,34.987
  Top Layer w0.508: 56.139,34.987 56.667,34.459 56.667,31.335 56.965,31.038 60.883,31.038 62.498,29.423 R15.2 64.355,29.152 65.08,29.152 68.964,25.268 R12.2
NetIC1_6: IC1.6 R1.1.2 R8.2 | length 20
  Top Layer w0.432: IC1.6@56.818,41.354 56.818,42.338
  Top Layer w0.508: 56.818,42.338 57.185,42.706 57.606,42.706 58.356,41.956 63.799,41.956 64.656,42.813 R8.2 68.239,42.813 70.089,44.663 R1.1.2
NetIC1_7: IC1.7 R1.1.1 R5.2 | length 18.6
  Top Layer w0.483: IC1.7 56.139,43.413
  Top Layer w0.508: 56.139,43.413 56.464,43.738 59.004,43.738 ; R5.2 59.004,43.738 ; R1.1.1 64.084,48.818 59.004,43.738
NetIC3_1: IC3.1 K12.6 | length 47.8
  Top Layer w0.254: IC3.1 120.669,51.843 120.669,48.366 v1(124.536,44.5)
  Bottom Layer w0.254: K12.6 94.002,26.359 95.075,27.432 107.468,27.432 v1(124.536,44.5)
NetIC3_2: IC3.2 K12.8 | length 46.1
  Top Layer w0.254: IC3.2 122.906,50.313 122.906,49.177 v1(125.044,47.04)
  Bottom Layer w0.254: K12.8 94.26,29.002 94.742,29.002 95.762,30.022 108.026,30.022 v1(125.044,47.04)
NetIC3_3: IC3.3 K12.10 | length 45.1
  Top Layer w0.254: IC3.3 124.79,49.137 v1(124.79,49.072)
  Bottom Layer w0.254: K12.10 94.002,33.524 100.406,39.928 115.646,39.928 v1(124.79,49.072)
NetIC3_10: IC3.10 R19.2 | length 91.4
  Top Layer w0.254: R19.2 71.555,15.798 71.704,15.946 71.704,23.777 71.853,23.926 83.239,23.926 83.388,24.074 83.388,35.356 83.642,35.61 v1(89.484,35.61) ; IC3.10 125.996,52.882 v1(126.06,52.882)
  Bottom Layer w0.254: v1(89.484,35.61) 95.961,42.087 114.757,42.087 125.357,52.687 125.865,52.687 v1(126.06,52.882)
NetIC3_30: IC3.30 R7.1 | length 40.8
  Top Layer w0.254: R7.1 79.76,55.422 v1(82.88,55.422) ; v1(113.137,62.598) 114.157,62.598 IC3.30
  Bottom Layer w0.254: v1(82.88,55.422) 90.056,62.598 v1(113.137,62.598)
NetIC3_38: IC3.38 K11.2 | length 50.8
  Top Layer w0.254: K11.2 79.578,35.61 80.594,36.626 84.15,36.626 85.674,38.15 92.786,38.15 97.612,42.976 v1(97.612,47.548) ; v1(110.291,54.287) 110.357,54.221 113.041,54.221 IC3.38
  Bottom Layer w0.254: v1(97.612,47.548) 104.501,47.548 110.374,53.42 110.374,53.982 110.485,54.093 v1(110.291,54.287)
NetIC3_39: IC3.39 K11.3 | length 50.4
  Top Layer w0.254: v1(105.74,43.992) 105.74,45.74 v1(107.547,47.548) ; v1(111.732,52.365) 111.891,52.365 IC3.39
  Bottom Layer w0.254: K11.3 78.339,30.561 80.625,30.561 94.056,43.992 v1(105.74,43.992) ; v1(107.547,47.548) 107.759,47.548 111.561,51.349 111.561,52.193 v1(111.732,52.365)
NetIC3_41: IC3.41 K11.6 | length 50.7
  Top Layer w0.254: v1(114.376,50.088) 114.376,53.434 IC3.41
  Bottom Layer w0.254: K11.6 79.578,26.974 81.356,28.752 81.356,29.768 94.494,42.906 106.686,42.906 108.026,44.246 108.849,44.246 114.069,49.466 114.069,49.506 114.376,49.813 v1(114.376,50.088)
NetIC3_44: IC3.44 K10.3 | length 24.5
  Top Layer w0.254: IC3.44 117.67,54.607 117.67,57.17 117.983,57.483 v1(117.983,57.672) ; K10.3 118.948,75.488 v1(118.948,67.106)
  Bottom Layer w0.254: v1(117.983,57.672) 117.932,57.722 117.932,66.09 v1(118.948,67.106)
NetIC3_45: IC3.45 K10.2 | length 27.7
  Top Layer w0.254: IC3.45 118.186,54.416 118.186,55.155 119.469,56.438 v1(120.726,56.438) ; v1(119.202,60.248) 119.456,60.248 120.998,58.706 v3(121.22,58.706) ; K10.2 120.218,66.928 120.345,66.801 120.345,65.963 v1(120.523,65.785)
  Bottom Layer w0.254: v1(119.202,60.248) 119.477,60.248 119.477,60.523 120.523,61.568 v1(120.523,65.785) ; v1(120.726,56.438) 120.92,56.632 120.92,57.376 121.234,57.69 121.234,58.691 v3(121.22,58.706)
NetIC3_46: IC3.46 K12.3 R22.1 | length 47.7
  Top Layer w0.254: R22.1 102.184,35.61 v1(109.804,43.23) ; IC3.46 119.117,54.639 v1(119.286,54.639)
  Top Layer w0.508: K12.3@96.551,23.68 96.854,23.68 97.516,24.343 R22.1
  Bottom Layer w0.254: v1(109.804,43.23) 113.207,43.23 119.286,49.309 v1(119.286,54.639)
NetIC3_47: IC3.47 K12.1 R21.1 | length 47.7
  Top Layer w0.254: R21.1@104.524,24.343 104.724,24.543 v1(104.724,26.212) ; v1(117.424,34.848) 116.154,36.118 116.154,50.97 IC3.47
  Top Layer w0.508: K12.1 98.581,23.164 99.466,23.164 v1(99.542,23.087)
  Bottom Layer w0.254: v1(104.724,26.212) 108.788,26.212 v1(117.424,34.848)
  Bottom Layer w0.508: v1(99.542,23.087) 102.666,26.212 v1(104.724,26.212)
NetIC3_48: IC3.48 K12.4 | length 57
  Top Layer w0.254: v1(104.47,20.37) 104.664,20.175 105.073,20.175 105.127,20.122 114.917,20.122 118.694,23.899 118.694,41.077 117.424,42.347 117.424,51.533 IC3.48
  Bottom Layer w0.254: K12.4 95.291,22.375 98.544,22.375 100.441,20.479 104.361,20.479 v1(104.47,20.37)
NetIRF9Z34NPBF_1: IRF9Z34NPBF.1 T2.3 T5.3 | length 45.9
  Top Layer w1.27: IRF9Z34NPBF.1 36.426,11.516 v1(36.426,8.42) ; T5.3 46.027,10.021 v1(46.037,10.011)
  Top Layer w2.54: v1(32.588,15.89) 32.588,14.739 35.634,11.693 ; v1(37.558,24.706) 46.78,24.706 48.268,23.218 T2.3
  Bottom Layer w1.27: v1(36.426,8.42) 36.426,7.345 38.133,5.638 41.224,5.638 45.598,10.011 v1(46.037,10.011)
  Bottom Layer w2.54: v1(32.588,15.89) 32.588,19.736 v1(37.558,24.706)
NetIRF9Z34NPBF_3: IRF9Z34NPBF.3 L2.1 | length 83.9
  Top Layer w2.54: IRF9Z34NPBF.3 41.069,11.538 41.224,11.383 41.224,9.593 43.811,7.006 54.976,7.006 56.464,8.493 56.464,15.798 57.516,16.85 57.516,23.418 56.464,23.418 51.384,28.498 48.267,28.498 45.711,31.053 45.711,52.351 48.537,55.177 51.133,55.177 L2.1@55.824,59.868
NetK1.1_2: 
NetK1.1_4: 
NetK3_2: K3.2 R2.1.1 R4.2 R9.2 R13.2 | length 58.1
  Top Layer w0.508: K3.2 56.384,71.758 61.544,66.598 61.544,60.828 R2.1.1 66.824,55.748 72.629,49.943 R4.2 72.629,35.428 69.635,32.434 69.635,32.234 69.364,31.963 R9.2 63.884,31.963 62.469,33.378 R13.2
NetK8_1: K8.1 L2.4 | length 19.2
  Top Layer w2.54: K8.1 38.644,64.082 42.493,60.234 46.065,60.234 L2.4
NetK8_2: K8.2 L2.3 | length 25.9
  Top Layer w2.54: K8.2 33.644,76.402 35.371,78.128 39.853,78.128 46.304,71.678 46.304,64.058
NetR7_2: R7.2 R10.2 T1.2 | length 7.7
  Top Layer w0.508: T1.2 73.194,58.028 73.048,57.882 73.048,57.816 72.816,57.584 72.816,55.623 73.114,55.325 R7.2
NetR11_2: R11.2 R12.1 | length 8.1
  Top Layer w0.508: R11.2 61.764,22.713 62.635,22.713 63.448,23.526 69.055,23.526 R12.1
NetR17_1: R17.1 T2.2 T4.1 T5.2 | length 13.9
  Top Layer w0.508: T5.2 45.058,13.898 45.058,18.503 R17.1 46.632,18.522 49.218,21.108 T2.2
  Top Layer w1.27: T2.2 50.901,21.158 51.57,21.828 T4.1
NetR19_1: R19.1 R20.2 T4.2 | length 18.4
  Top Layer w0.508: T4.2@52.874,19.928 T4.2
  Top Layer w1.27: R20.2 51.384,16.28 v1(51.358,16.306) 51.358,18.412 T4.2@52.874,19.928 ; v1(61.087,15.772) 61.112,15.798 R19.1
  Bottom Layer w1.27: v1(51.358,16.306) 51.892,15.772 v1(61.087,15.772)
PC4: IC3.16 K5.1 | length 21.2
  Top Layer w0.254: IC3.16 130.627,66.857 130.627,75.493 K5.1
PC5: IC3.17 K5.2 | length 21
  Top Layer w0.254: IC3.17 123.52,60.457 123.52,61.158 129.415,67.053 129.415,70.431 126.822,73.024 K5.2
PD3: IC3.23 K9.1 | length 35.3
  Top Layer w0.254: K9.1 97.612,70.916 112.598,70.916 120.525,62.988 120.849,62.988 121.101,62.736 121.101,62.281 IC3.23
PD4: IC3.24 K9.2 | length 36.8
  Top Layer w0.254: K9.2 89.992,74.726 94.818,69.9 112.549,69.9 118.166,64.283 118.166,64.07 IC3.24
PD5: IC3.25 K9.3 | length 37.8
  Top Layer w0.254: K9.3 87.468,75.979 87.468,74.963 93.294,69.138 112.344,69.138 117.734,63.747 117.734,63.493 118.229,62.998 IC3.25
PD6: IC3.26 K9.4 | length 39.8
  Top Layer w0.254: K9.4 84.928,75.979 84.928,74.963 91.516,68.376 111.836,68.376 116.916,63.296 116.916,62.668 IC3.26
PD7: IC3.27 K9.5 | length 42
  Top Layer w0.254: K9.5 82.372,74.726 89.484,67.614 111.263,67.614 IC3.27
PE1: IC3.31 K4.1 | length 54.5
  Top Layer w0.254: K4.1 75.26,74.726 83.642,66.344 v1(87.96,66.344) ; v1(110.389,63.769) 111.527,62.631 111.527,62.334 112.471,61.391 114.657,61.391 IC3.31
  Bottom Layer w0.254: v1(87.96,66.344) 88.468,66.344 89.992,64.82 109.338,64.82 v1(110.389,63.769)
PE2: IC3.32 K4.2 | length 53.6
  Top Layer w0.254: K4.2 68.148,71.932 75.006,71.932 85.928,61.01 v1(106.248,61.01) ; v1(109.804,61.264) 109.804,61.369 109.953,61.518 110.82,61.518 111.836,60.502 114.839,60.502 IC3.32
  Bottom Layer w0.254: v1(106.248,61.01) 106.502,61.264 v1(109.804,61.264)
PE3: IC3.33 K4.3 | length 52.1
  Top Layer w0.254: K4.3 73.781,69.646 83.687,59.74 v1(89.484,59.74) ; v1(110.058,59.486) 110.252,59.68 110.655,59.68 110.715,59.74 114.306,59.74 114.373,59.806 114.827,59.806 IC3.33
  Bottom Layer w0.254: v1(89.484,59.74) 89.738,59.486 v1(110.058,59.486)
RXD: IC3.35 K6.3 | length 50.4
  Top Layer w0.254: K6.3 91.008,30.022 91.008,34.34 104.978,48.31 v1(104.978,58.47) ; v1(111.582,58.47) 111.687,58.47 111.836,58.618 111.836,58.724 112.344,59.232 113.987,59.232 IC3.35
  Bottom Layer w0.254: v1(104.978,58.47) v1(111.582,58.47)
TXD: IC3.34 K6.2 | length 48.7
  Top Layer w0.254: K6.2 92.278,28.752 92.278,33.882 107.663,49.268 107.744,49.268 108.03,49.554 v1(108.305,49.554) ; IC3.34 115.909,58.018 115.909,57.648 v1(116.103,57.454)
  Bottom Layer w0.254: v1(108.305,49.554) 108.5,49.749 108.5,50.491 108.706,50.697 108.706,50.865 115.1,57.259 115.909,57.259 v1(116.103,57.454)
"VCC + 1.1": B2.3 K1.2 RE1.21 | length 36.4
  Top Layer w2.54: 13.284,51.358 v1(15.824,51.358)
  Bottom Layer w2.54: K1.2 8.204,69.178 14.573,62.809 16.08,62.809 17.329,61.56 19.936,61.56 21.424,60.072 21.424,55.522 17.26,51.358 v1(15.824,51.358)
"VCC + 2.2": K2.2 RE1.12 RE1.24 | length 33.7
  Top Layer w2.54: v1(15.824,58.978) 17.597,58.978 21.369,62.749 21.369,73.793 K2.2
  Bottom Layer w2.54: RE1.24 8.284,60.948 9.772,59.46 15.341,59.46 v1(15.824,58.978) ; v1@15.884,59.038 RE1.12
"VCC - 1.1": B1.3 B2.4 K1.1 RE1.11 | length 49.2
  Top Layer w2.54: K1.1 13.204,69.794 11.252,67.842 11.252,65.518 10.826,65.092 10.826,59.055 RE1.11 8.204,51.438 8.204,49.333 10.449,47.089 22.477,47.089 B1.3
"VCC - 2.2": B1.4 K2.1 RE1.22 | length 52.2
  Top Layer w2.54: RE1.22 17.803,64.618 v1(17.803,69.138) 17.803,77.278 19.291,78.766 21.395,78.766 K2.1 ; B1.4 21.193,50.596 v1(23.961,53.363)
  Bottom Layer w2.54: v1(17.803,69.138) 24.496,69.138 25.984,67.65 25.984,55.351 24.077,53.445 24.043,53.445 v1(23.961,53.363)
VIN: B1.1 C1.1.1 IRF9Z34NPBF.2 R3.1.1 R17.2 T2.1 | length 54.1
  Top Layer w0.508: 32.029,24.992 34.086,24.992 ; R3.1.1@34.925,27.078 R3.1.1
  Top Layer w1.27: 34.086,24.992 34.925,25.831 R3.1.1@34.925,27.078
  Top Layer w2.54: v1(18.364,33.578) C1.1.1 19.329,24.992 32.029,24.992 36.284,20.738 IRF9Z34NPBF.2@38.684,20.738 ; v1(18.364,41.198) 18.999,41.833 B1.1 ; IRF9Z34NPBF.2 38.684,18.963 39.571,19.85 40.239,20.518 40.864,20.518 41.224,20.878 46.304,20.878
  Bottom Layer w2.54: v1(18.364,33.578) v1(18.364,41.198)
pads on no net: IC3.4 IC3.5 IC3.6 IC3.7 IC3.8 IC3.9 IC3.12 IC3.13 IC3.18 IC3.19 IC3.36 IC3.37 K12.5 K12.7 RE1.14
copper on no net:
  other v2: 2.565,2.513 134.061,3.631 134.442,81.736 2.413,82.219

## Polygon pours and split planes (outlines as drawn)
GND on Top Layer "NONET_L-01_P-001" (solid, pour order 0): 5.08,79.248 5.08,20.32 22.352,3.048 74.168,3.048 81.28,10.16 132.08,10.16 132.08,79.248 131.064,79.248 132.08,79.248 131.064,79.248

## Silkscreen, mask and mechanical layers (free items; w line width, h text height)
Top Overlay:
  text "Ceyhan Yildiz" at 104.902,4.91 h1.78
  text "2022-2023" at 104.902,1.27 h1.52

## Text inside footprints (layer, text, board x,y; h text height)
B1: Top Overlay "+" at 21.361,44.855 h1.52 r180; Top Overlay "~" at 26.441,50.29 h1.52 r180; Top Overlay "~" at 21.317,50.201 h1.52 r180; Top Overlay "-" at 26.492,44.245 h1.52 r180
B2: Top Overlay "~" at 13.792,50.722 h1.52 r180; Top Overlay "~" at 8.712,50.214 h1.52 r180; Top Overlay "-" at 13.792,44.245 h1.52 r180; Top Overlay "+" at 8.737,44.703 h1.52 r180
K9: Top Overlay "5" at 81.102,73.1 h1.02; Top Overlay "1" at 92.557,73.202 h1.02
K11: Top Overlay "1" at 76.504,34.06 h1.02 r270; Top Overlay "2" at 79.197,34.34 h1.02 r270; Top Overlay "5" at 76.479,24.84 h1.02 r270; Top Overlay "6" at 79.197,24.865 h1.02 r270
K12: Top Overlay "9" at 97.012,32.544 h1.02 r90; Top Overlay "10" at 94.472,32.544 h1.02 r90; Top Overlay "2" at 94.532,19.264 h1.02 r90; Top Overlay "1" at 97.072,19.564 h1.02 r90